# Altium PCB FMC_AWG_DAC_PSU.PcbDoc (part 2 of 2)
Units mm, origin at the board's own origin, x right, y up, seen from the top; angles counter-clockwise.
Board outline 19.1 x 69 mm, 6 copper layers (TOP, L2, L3, L4, L5, BOTTOM), stack 1.482 mm thick; 113 components, 49 nets, 281 pads, 213 vias.
Unrouted connection lines stored in the file: 1.
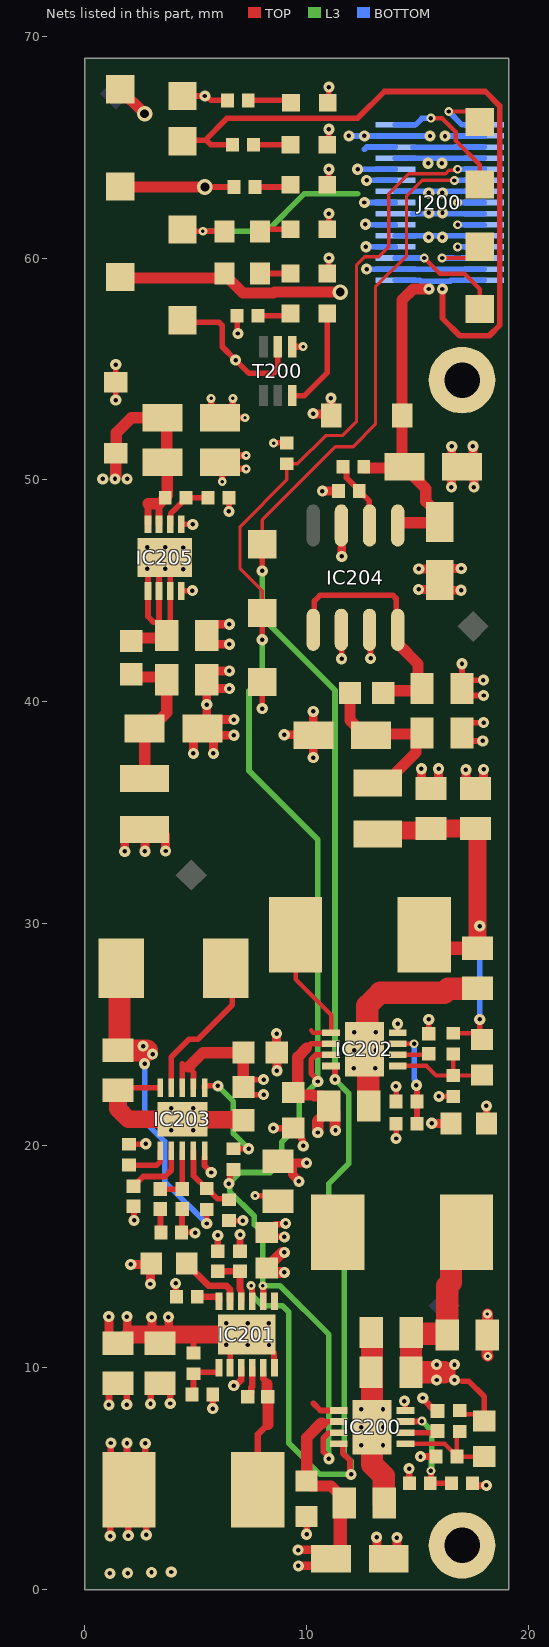
[diagram p6: the nets of this part, all layers, seen from the top]

## Via types
v1: diameter 0.5, hole 0.2, TOP to BOTTOM, tented both sides, 160 vias
v2: diameter 0.5, hole 0.2, TOP to BOTTOM, 24 vias
v3: diameter 0.4, hole 0.15, TOP to BOTTOM, tented both sides, 14 vias
v4: diameter 0.4, hole 0.2, TOP to BOTTOM, tented both sides, 12 vias
v5: diameter 0.7, hole 0.4, TOP to BOTTOM, tented both sides, 3 vias

## Nets (pads, with @x,y where several pads share a name; then routed paths per layer and width w, separated by ;. In a path a pad name is that pad's centre, name@x,y a point inside that pad or via, vN(x,y) a via of type N, cw(c..) or ccw(c..) an arc to the next point about the centre after c; other vN are vias at no path point)
GND: B200.1 B201.1 C200.1 C201.1 C203.1 C204.1 C205.1 C207.1 C208.1 C212.1 C213.1 C215.1 C216.1 C217.1 C218.1 C219.1 C220.1 C221.1 C222.1 C223.1 C225.1 C226.2 C227.2 C228.2 C229.1 C230.1 C231.1 C232.1 C233.1 C234.1 C235.1 C236.1 C237.2 C238.1 C239.1 D200.2 D201.1 IC200.8 IC200.9 IC201.9 IC202.8 IC202.9 IC203.5 IC203.10 IC203.11 IC204.3 IC204.6 IC204.7 IC205.4 IC205.5 J200.5 J200.6 J200.10 J200.12 J200.15 J200.16 J200.19 J200.20 J200.23 J200.24 J200.27 J200.28 L201.2 LD200.1 LD201.1 LD202.1 LD203.2 LD204.1 R202.1 R203.1 R205.2 R209.1 R210.1 R214.1 R216.1 R219.1 R225.1 T200.4 TP204.1 TP207.1 | length 116.9
  TOP w0.254: v1(1.4,53.6) 1.4,54.072 D201.1@1.714,54.385 ; v1(1.4,55.2) 1.4,54.733 1.591,54.542 D201.1@1.732,54.542 ; C222.1@1.5,22.5 1.62,22.62 IC203.5@3.4,22.62 ; v1(2.224,16.643) C223.1@2.224,17.273 ; IC205.4@4.342,45.013 v1(4.855,45.013) ; IC205.5@4.35,48 v1(4.869,48) ; C225.1@4.4,17.15 4.385,17.135 4.385,16.115 R216.1@4.37,16.1 4.951,16.1 v1(4.975,16.077) ; C235.1@5.3,38.8 C235.1@5.5,39 ; IC203.10@5.4,19.482 5.4,19.1 v1(5.7,18.8) ; R214.1@6.5,16.63 v1(7.13,16.63) ; v1(6.5,48.581) R225.1@6.5,49.3 ; v3(7.68,17.756) 8.444,17.756 C239.1@8.7,17.5 ; v1(8,39.7) TP207.1@8,40.9 ; LD201.1@10.925,59.3 11,59.375 v1(11,60) ; LD200.1@10.925,61.3 11,61.375 v1(11,62) ; LD202.1@10.925,63.3 11,63.375 v1(11,64) ; LD204.1@10.925,65.1 11,65.175 v1(11,65.8) ; LD203.2@10.948,67 11,67.052 v1(11,67.7) ; v1(11.579,41.947) IC204.6@11.579,42.666 ; v1(12.879,41.961) IC204.7@12.879,42.68 ; v1(14.03,20.33) R210.1@14.03,21 ; IC202.8@14.1,25.1 v1(14.1,25.5) ; v1(14.4,8.5) 14.45,8.45 IC200.8@14.45,8.077 ; C220.1@15.5,25.05 v1(15.5,25.7) ; v1(15.961,22.231) 15.962,22.23 R209.1@16.6,22.23 ; C230.1@17,41 v1(17,41.719) ; C229.1@17.216,38.242 v1(17.935,38.242) ; C230.1@17.24,40.984 v1(17.959,40.984) ; C229.1@17.252,39.064 v1(17.971,39.064) ; C230.1@17.252,40.288 v1(17.971,40.288)
  TOP w0.3: v1@1.093,8.429 1.096,8.432 1.096,9.086 C218.1@1.098,9.088 ; v1(1.151,2.417) 1.155,2.42 1.155,3.074 L201.2@1.157,3.076 ; L201.2@1.174,5.953 1.176,5.955 1.176,6.609 v1(1.179,6.613) ; v1@1.894,8.44 1.898,8.444 1.898,9.098 C218.1@1.9,9.1 ; L201.2@1.902,5.945 1.904,5.947 1.904,6.601 v1(1.908,6.605) ; v1(1.962,2.441) 1.966,2.445 1.966,3.099 L201.2@1.968,3.101 ; L201.2@2.721,5.937 2.723,5.938 2.723,6.593 v1(2.727,6.596) ; v1(2.773,2.473) 2.776,2.476 2.776,3.131 L201.2@2.778,3.132 ; v1@2.966,8.477 2.969,8.48 2.969,9.135 C219.1@2.971,9.136 ; v1@3.857,8.493 3.861,8.496 3.861,9.151 C219.1@3.862,9.152 ; v3(5.698,53.676) 5.698,53.202 C234.1@6.1,52.8 v3(7.225,52.801) v3(7.225,52.801) ; R205.2@5.735,8.865 5.77,8.83 v1(5.77,8.159) ; v3(6.2,49.926) C233.1@6.2,50.4 ; C234.1@6.674,53.202 v3(6.674,53.676) ; v1(6.715,9.201) 6.801,9.201 7.05,9.45 IC201.9@7.05,10 ; C233.1@6.8,50.5 v3(7.274,50.5) ; C233.1@6.8,51.1 v3(7.274,51.1) ; v1(8.5,20.8) 9.425,20.8 9.75,20.475 9.75,20.323 9.81,20.263 9.81,20.033 v1(9.848,19.994) ; v1(9,15.9) 8.4,15.9 8.151,16.149 8.274,16.149 8.59,16.465 9.015,16.465 v1(9.053,16.503) ; T200.4@9.35,56 9.357,56.007 v3(9.844,56.007) ; v1(10,2.5) C200.1@10,3.3 ; v1(15.13,6.001) R202.1@15.93,6.001 ; v1(15.232,8.639) 15.232,8.618 15.812,8.038 C207.1@15.812,7.939 ; R203.1@17.505,4.7 v1(18.1,4.7) ; C238.1@18.1,21 v1(18.1,21.8)
  TOP w0.4: v1(4.9,37.681) C235.1@4.9,38.4 ; C235.1@5.5,39 C231.1@5.5,40.7 ; v1(5.8,37.681) C235.1@5.8,38.4 ; C231.1@5.8,40.6 v1(6.519,40.6) ; C231.1@5.8,41.4 v1(6.519,41.4) ; C232.1@5.8,42.6 v1(6.519,42.6) ; C232.1@5.8,43.5 v1(6.519,43.5) ; C235.1@6,38.5 v1(6.719,38.5) ; C235.1@6,39.2 v1(6.719,39.2) ; C221.1@8.645,24.427 v1(8.645,25.057) ; v1(8.658,23.383) C221.1@8.658,24.013 ; v1(8.99,38.523) C228.2@9.709,38.523 ; v1(10.294,52.987) 10.313,52.968 10.84,52.968 10.84,52.71 D200.2@10.85,52.7 ; v1(10.298,37.489) C228.2@10.298,38.207 ; C228.2@10.298,38.853 v1(10.298,39.572) ; v1(10.711,49.5) R219.1@11.43,49.5 ; D200.2@10.871,53.092 10.946,53.092 11.094,53.24 11.094,53.684 v1(11.089,53.69) ; v1(11.58,46.556) IC204.3@11.58,47.275 ; C237.2@13.165,1.281 v1@13.165,2.381 ; C237.2@14.074,1.266 v1@14.074,2.366 ; v1(15.045,45.069) 15.59,45.069 C227.2@15.662,44.996 ; v1(15.052,45.992) 15.689,45.992 C227.2@15.694,45.996 ; C215.1@15.169,36.272 v1(15.169,36.991) ; C215.1@15.947,36.272 v1(15.947,36.991) ; C227.2@16.249,46.012 v1(16.967,46.012) ; C227.2@16.319,45.035 16.323,45.03 v1(16.957,45.03) ; C226.2@16.496,50.938 16.537,50.979 v1(16.537,51.514) ; v1(16.518,49.679) 16.518,50.265 C226.2@16.535,50.281 ; C217.1@17.176,36.223 v1(17.176,36.942) ; v1(17.492,51.518) 17.492,50.911 C226.2@17.496,50.906 ; C226.2@17.512,50.351 17.534,50.33 v1(17.534,49.679) ; C217.1@17.974,36.244 v1(17.974,36.963)
  TOP w0.5: TP204.1@1.6,67.6 v5(2.7,66.5) ; v3(18.144,12.423) 18.144,11.498 C203.1@18.132,11.485 18.132,10.548 v3(18.157,10.523)
  TOP w0.8: C222.1@1.5,22.5 1.5,21.669 1.969,21.2 IC203.11@4.4,21.2 4.425,21.175 7.125,21.175 C236.1@7.15,21.15
  TOP w1: C213.1@12.8,21.8 12.775,21.825 12.775,24.162 12.599,24.338 12.734,24.473 12.734,26.314 13.319,26.9 16.2,26.9 16.375,27.075 17.675,27.075 C216.1@17.7,27.1 ; C205.1@12.914,11.585 12.914,11.41 12.95,11.374 IC200.9@12.95,7.327 ; IC200.9@12.949,7.315 12.949,5.651 13.475,5.125 13.475,3.925 C201.1@13.5,3.9
  BOTTOM w0.254: v1(12.3,64) J200.10@14,64 ; v1(12.6,62.5) J200.16@14,62.5 J200.16@14,62.5 ; 12.6,64.9 12.7,65 J200.6@14,65 ; v1(12.649,61.522) 12.67,61.502 13.998,61.502 J200.20@14,61.5 J200.20@13.998,61.498 ; v1(12.67,60.508) 12.678,60.5 J200.24@14,60.5 J200.24@13.998,60.498 ; v1(12.7,59.5) J200.28@14,59.5 J200.27@18,59.5 ; v1(12.7,63.5) J200.12@14,63.5 ; J200.6@14.773,64.998 15.103,64.998 15.11,64.991 16.676,64.991 16.685,65 J200.5@18,65 ; v4(16.8,62.496) 16.802,62.498 17.998,62.498 J200.15@18,62.5 ; v4(16.802,60.498) 16.804,60.5 J200.23@18,60.5 J200.23@18.002,60.502 ; v4(16.802,61.498) 16.804,61.5 J200.19@18,61.5 J200.19@18.002,61.502
  other v1: 1.136,0.736 1.938,0.748 3.009,0.784 3.9,0.8 13.153,2.365 14.062,2.35 1.093,8.329 1.894,8.34 2.966,8.377 3.857,8.393 3.9,20.7 4.9,20.7 3.9,21.7 4.9,21.7 5.5,39.881
  other v2: 12.454,6.509 13.44,6.512 12.467,7.32 13.44,7.323 12.467,8.13 13.44,8.134 12.127,23.497 13.1,23.5 12.141,24.307 13.114,24.311 12.141,25.118 13.114,25.121
N7V5A: C233.2 C234.2 D201.2 IC205.7 IC205.8 J200.7 J200.8 R222.1 R223.2 TP209.1 | length 16.7
  TOP w0.254: TP209.1@4.7,67.3 v1(5.419,67.3) 5.486,67.3 5.686,67.1 R222.1@6.43,67.1
  TOP w0.3: IC205.8@2.85,48.002 2.85,48.338 2.852,48.34 2.852,48.926 ; IC205.7@3.35,48 R223.2@3.35,48.92
  TOP w0.508: v1@1.4,50.2 D201.2@1.4,51.2 1.424,51.224 1.424,52.124 2.1,52.8 C234.2@3.5,52.8 ; 2.852,48.926 R223.2@3.356,48.926 ; C233.2@3.225,50.8 C233.2@3.5,50.8 ; R223.2@3.35,48.92 3.73,49.3 3.715,49.315 3.715,50.785 C233.2@3.7,50.8 ; C233.2@3.677,50.823 3.677,51.2 3.7,51.223 3.7,52.654 C234.2@3.677,52.677
  BOTTOM w0.254: J200.8@13.998,64.498 J200.8@14,64.5 J200.7@18,64.5
  other v1: 0.815,50.051 1.365,50.051 1.915,50.051 15.476,64.269 16.09,64.269
N8V0: C209.1 C210.1 C211.1 C218.2 C219.2 IC201.8 IC201.12 IC201.13 L206.1 R204.1 R206.1 | length 22.1
  TOP w0.254: C209.1@2.958,14.658 C209.1@3,14.7 ; R206.1@4.9,10.67 4.9,11.4 5,11.5 ; IC201.8@6.55,10 6.55,10.75 IC201.13@7.3,11.5 7.7,11.5 8.527,10.673 8.527,10.023 IC201.12@8.55,10
  TOP w0.3: v1(4.1,13.8) 4.1,13.23 R204.1@4.13,13.2 ; v1(5.995,15.964) 5.997,15.961 5.997,15.253 C210.1@6,15.25 ; C211.1@7,15.25 v1(7,16)
  TOP w0.4: C218.2@1.1,11.1 v1@1.1,12.3 ; v1(1.806,33.264) L206.1@1.806,33.983 ; C218.2@1.918,11.103 v1@1.918,12.303 ; v1(2.074,14.658) 2.958,14.658 v1(2.958,13.774) ; v1(2.711,33.273) L206.1@2.711,33.992 ; C219.2@3.027,11.076 v1@3.027,12.276 ; v1(3.647,33.285) L206.1@3.647,34.003 ; C219.2@3.789,11.08 v1@3.789,12.28
  TOP w0.508: C218.2@1.5,11.1 C218.2@1.771,11.371
  TOP w0.8: C218.2@1.5,11.1 1.675,11.1 2.075,11.5 5,11.5 IC201.13@7.3,11.5
  other v1: 3.012,12.282 3.775,12.286 1.085,12.306 1.903,12.309
  other v2: 7.343,11.027 8.303,11.027 6.382,11.041 6.379,12.014 7.339,12 8.3,12
N8V0A: C231.2 C235.2 L206.2 L207.1 | length 6.7
  TOP w0.508: L207.1@2.1,41.25 2.225,41.125 3.575,41.125 C231.2@3.7,41 3.7,39.525 2.975,38.8 C235.2@2.7,38.8 L206.2@2.7,36.55
N8V0A1: C232.2 IC205.1 IC205.2 IC205.3 IC205.9 L207.2 | length 11.4
  TOP w0.254: v2(2.821,45.998) 2.85,45.969 IC205.1@2.85,45 2.85,43.85 3.114,43.586 3.289,43.586 C232.2@3.35,43.525 ; IC205.9@3.6,46.5 3.35,46.25 IC205.2@3.35,45 C232.2@3.35,43.525 ; v2(3.632,45.998) 3.85,45.78 IC205.3@3.85,45 3.85,43.15 C232.2@3.7,43 3.35,43.35 C232.2@3.35,43.525
  TOP w0.508: L207.2@2.1,42.75 2.225,42.875 3.575,42.875 C232.2@3.7,43
  other v2: 4.442,45.984 4.439,46.957 2.818,46.971 3.628,46.971
NetC202_1: C202.1 IC200.5 R200.1 R202.2 | length 5
  TOP w0.2: IC200.5@14.45,6.577 16.213,6.577 R202.2@16.77,6.02 ; R200.1@16.8,7.13 16.77,7.1 R202.2@16.77,6.02 ; C202.1@18,6.3 17.7,6 R202.2@16.77,6 R202.2@16.77,6.02
NetC206_1: C206.1 IC201.11 L201.1 | length 5.5
  TOP w0.3: L201.1@7.8,4.5 7.8,7 8.25,7.45 ; IC201.11@8.05,9.75 8.05,9.5 8.209,9.341 8.209,9.258
  TOP w0.5: 8.209,9.258 8.209,8.741 C206.1@8.25,8.7 8.25,7.45
NetC206_2: C206.2 IC201.10 | length 1.4
  TOP w0.3: C206.2@7.35,8.7 7.51,8.86 7.51,9.11 7.55,9.15 IC201.10@7.55,10
NetC207_2: C207.2 IC200.6 | length 1.4
  TOP w0.254: IC200.6@14.45,7.077 14.452,7.079 15.729,7.079 C207.2@15.8,7.15
NetC209_2: C209.2 IC201.5 | length 3
  TOP w0.3: C209.2@4.6,14.7 4.6,14.675 5.575,13.7 6.374,13.7 6.55,13.524 IC201.5@6.55,13
NetC210_2: C210.2 C211.2 IC201.4 | length 2.4
  TOP w0.3: C210.2@6,14.35 C211.2@7,14.35 7,13.525 7.05,13.475 IC201.4@7.05,13
NetC214_1: C214.1 IC202.5 R207.1 R209.2 | length 5
  TOP w0.2: IC202.5@14.1,23.6 15.4,23.6 15.83,23.17 R209.2@16.6,23.17 ; R207.1@16.6,24.13 R209.2@16.6,23.17 ; C214.1@17.9,23.2 17.87,23.17 R209.2@16.6,23.17
NetC220_2: C220.2 IC202.6 | length 1.4
  TOP w0.2: IC202.6@14.1,24.1 15.45,24.1 C220.2@15.5,24.15
NetC223_2: C223.2 IC203.7 | length 2.9
  TOP w0.254: C223.2@2.2,18.18 2.641,18.621 3.621,18.621 3.9,18.9 IC203.7@3.9,19.78
NetC224_1: C224.1 R216.2 | length 1.1
  TOP w0.254: C224.1@3.4,17.15 3.415,17.135 3.415,16.115 R216.2@3.43,16.1
NetC224_2: C224.2 C225.2 IC203.8 | length 2.7
  TOP w0.254: C224.2@3.4,18.05 C225.2@4.4,18.05 IC203.8@4.4,19.78
NetIC200_1: IC200.1 L200.1 | length 1.3
  TOP w0.254: 10.3,8.4 10.623,8.077 IC200.1@11.45,8.077
NetIC200_7: IC200.7 R201.1 R203.2 | length 4.7
  TOP w0.254: IC200.7@14.45,7.577 14.452,7.579 15.174,7.579 v4(15.194,7.6) ; v4(15.6,5.363) 15.6,4.83 R201.1@15.57,4.8 R203.2@16.53,4.8
  L3 w0.254: v4(15.194,7.6) 15.634,7.161 15.634,5.792 15.628,5.786 15.628,5.391 v4(15.6,5.363)
NetIC201_6: IC201.6 R204.2 | length 1.2
  TOP w0.3: R204.2@5.07,13.2 6.05,13.2 IC201.6@6.05,13
NetIC201_7: IC201.7 R205.1 R206.2 | length 2.1
  TOP w0.254: R205.1@4.9,9 R206.2@4.9,9.73 4.97,9.8 6.027,9.8 6.05,9.823 IC201.7@6.05,10
NetIC202_1: IC202.1 L202.1 | length 6
  TOP w0.2: L202.1@9.5,29.5 9.5,27.5 11.1,25.9 IC202.1@11.1,25.1 10.3,25.1 10.2,25.2
NetIC202_7: IC202.7 R208.1 R210.2 | length 4.4
  TOP w0.2: IC202.7@14.1,24.6 v4(14.84,24.6)
  TOP w0.254: v1(14.942,22.731) 14.942,22.658 14.97,22.63 R210.2@14.97,21
  BOTTOM w0.254: v4(14.84,24.6) 14.84,23.003 14.894,22.948 14.894,22.778 v1(14.942,22.731)
NetIC203_1: IC203.1 R212.2 | length 4.6
  TOP w0.254: IC203.1@5.4,22.62 5.4,22.698 5.402,22.7 v1(6,22.7) ; R212.2@6.9,19.87 7.384,19.87 v1(7.386,19.868)
  L3 w0.254: v1(6,22.7) 6.7,22 6.7,20.554 v1(7.386,19.868)
NetIC203_4: IC203.4 L203.1 | length 6.8
  TOP w0.254: IC203.4@3.9,22.62 3.9,24 4.7,24.8 5.1,24.8 6.65,26.35 L203.1@6.65,28
NetIC203_6: IC203.6 R215.2 | length 2
  TOP w0.254: R215.2@2,19.13 3.251,19.13 3.4,19.279 IC203.6@3.4,19.78
NetIC203_9: IC203.9 R213.1 R214.2 | length 3.2
  TOP w0.254: IC203.9@4.9,19.78 4.9,18.65 5.48,18.07 R213.1@5.5,18.07 ; R213.1@5.52,18.07 5.982,17.608 6.462,17.608 R214.2@6.5,17.57
NetIC204_2: IC204.2 R217.1 R219.2 | length 3.2
  TOP w0.254: R217.1@11.63,50.6 11.793,50.437 11.793,50.097 12.37,49.52 12.37,49.48 12.533,49.317 12.553,49.317 12.825,49.045 12.825,47.96 IC204.2@12.835,47.95
NetIC205_6: IC205.6 R223.1 R225.2 | length 2.5
  TOP w0.254: IC205.6@3.85,48 3.873,48.023 3.873,48.487 4.022,48.636 4.026,48.636 4.59,49.2 R225.2@5.56,49.2
NetJ200_1: J200.1 TP200.1 | length 3.4
  TOP w0.2: v4(16.4,66.6) 17.325,66.6 TP200.1@17.8,66.125
  BOTTOM w0.254: v4(16.4,66.6) 17,66 J200.1@18,66
NetJ200_2: J200.2 TP201.1 | length 5.9
  TOP w0.2: v4(15.6,66.3) 15.604,66.296 16.1,66.296 16.402,65.994 16.408,65.994 16.709,65.693 16.709,65.291 17.8,64.2 TP201.1@17.8,63.316
  BOTTOM w0.254: J200.2@14,66 14.9,66 15.193,66.293 15.574,66.293 v4@15.581,66.3
NetJ200_25: J200.25 TP202.1 | length 3.8
  TOP w0.2: v4@16.117,60 17.292,60 TP202.1@17.8,60.508
  BOTTOM w0.254: v4(16.1,60) 16.167,60 16.587,60 16.593,59.994 17.011,59.994 17.015,59.998 17.998,59.998 J200.25@18,60
NetJ200_26: J200.26 TP203.1 | length 5.3
  TOP w0.2: v4(15.3,60) 16,59.3 17.1,59.3 17.8,58.6 TP203.1@17.8,57.7
  BOTTOM w0.254: J200.26@14,60 v4(15.3,60)
NetLD200_2: LD200.2 R218.1 | length 1.4
  TOP w0.254: R218.1@7.9,61.2 8,61.3 LD200.2@9.275,61.3
NetLD201_2: LD201.2 R220.1 | length 1.4
  TOP w0.254: R220.1@7.9,59.3 LD201.2@9.275,59.3
NetLD202_2: LD202.2 R221.1 | length 1.6
  TOP w0.254: R221.1@7.67,63.2 9.175,63.2 LD202.2@9.275,63.3
NetLD203_1: LD203.1 R222.2 | length 2
  TOP w0.254: R222.2@7.37,67.1 9.198,67.1 LD203.1@9.298,67
NetLD204_2: LD204.2 R224.2 | length 1.7
  TOP w0.254: R224.2@7.6,65.1 LD204.2@9.275,65.1
NetLD205_1: LD205.1 T200.3 | length 4.7
  TOP w0.254: T200.3@9.35,53.8 9.9,53.8 10.925,54.825 LD205.1@10.925,57.5
NetLD205_2: LD205.2 R226.1 | length 1.5
  TOP w0.254: R226.1@7.8,57.4 9.175,57.4 LD205.2@9.275,57.5
P1V7: C222.2 J200.17 J200.18 L203.2 R213.2 T200.5 TP211.1 | length 23.9
  TOP w0.254: TP211.1@4.7,57.1 6.051,57.1 6.2,56.951 6.2,56 v1(6.8,55.4) 7.4,54.8 8.5,54.8 8.7,55 T200.5@8.7,56 ; v1(5.5,16.5) R213.2@5.5,17.13
  TOP w1: C222.2@1.5,24.3 C222.2@1.55,24.3 ; L203.2@1.65,28 1.575,27.925 1.575,24.325 C222.2@1.55,24.3 ; 2.8,24.3 C222.2@1.55,24.3
  BOTTOM w0.254: v1(2.7,23.7) 2.7,21.1 3.6,20.2 3.6,18.4 v1(5.5,16.5) ; J200.18@14.773,61.998 15.389,61.998 15.395,61.992 16.909,61.992 16.917,62 J200.17@18,62
  other v1: 3.061,24.135 2.635,24.49 15.507,62.036 16.121,62.036
P3V3: C221.2 C236.2 IC203.2 IC203.3 J200.21 J200.22 R211.2 R215.1 R220.2 TP206.1 | length 23.4
  TOP w0.254: TP206.1@1.6,59.14 TP206.1@1.64,59.1 ; R215.1@2,20.07 2.73,20.07 v1(2.753,20.093) ; IC203.3@4.4,22.62 4.4,23.7 ; IC203.2@4.9,22.62 4.9,23.3 ; C221.2@7,24.05 C221.2@7.15,24.2 ; C236.2@7.433,22.304 v1(8.063,22.304) ; C236.2@7.433,22.984 v1(8.063,22.984) ; v3(8.515,51.66) 8.525,51.67 R211.2@9.1,51.67
  TOP w0.5: TP206.1@1.64,59.1 6.1,59.1 R220.2@6.3,59.3 6.3,59.25 7.127,58.423 8.506,58.423 8.546,58.463 v5(11.516,58.463)
  TOP w0.508: 4.652,23.552 4.716,23.552 4.77,23.606 ; 4.684,23.552 5.332,24.2 C221.2@7.15,24.2 ; C221.2@7,24.05 7.054,24.05 7.15,23.954 C236.2@7.15,22.65
  BOTTOM w0.254: J200.22@14,61 17.46,61 17.46,60.998 17.998,60.998 J200.21@18,61
  other v1: 15.498,60.935 16.112,60.935
P3V6: C202.2 C203.2 C204.2 C205.2 J200.13 J200.14 L200.2 R200.2 R218.2 TP205.1 | length 27.1
  TOP w0.2: R200.2@16.8,7.97 16.87,7.9 C202.2@18,7.9
  TOP w0.254: TP205.1@4.4,61.28 4.472,61.208 v3(5.323,61.208) 6.292,61.208 R218.2@6.3,61.2 ; 17,9.4 17.3,9.4 18,8.7 18,7.9 C202.2@18,7.6
  TOP w1: 16.2,9.8 C204.2@14.7,9.8 14.707,9.807 14.707,11.579 C205.2@14.714,11.585 14.714,11.56 14.739,11.535 16.307,11.535 C203.2@16.332,11.51 ; C203.2@16.332,11.485 C203.2@16.332,11.51 ; L200.2@17.2,16.1 16.5,15.4 16.5,13.854 16.332,13.685 C203.2@16.332,11.51
  L3 w0.254: v3(5.323,61.208) 8.208,61.208 9.9,62.9 12.29,62.9
  BOTTOM w0.254: J200.14@14,63 J200.13@18,63
  other v1: 15.858,9.449 16.662,9.449 15.858,10.143 16.662,10.143 15.5,62.937 16.114,62.937
P7V5A: C226.1 C227.1 D200.1 IC204.1 J200.29 J200.30 R217.2 R224.1 TP210.1 | length 51.1
  TOP w0.254: TP210.1@4.7,65.3 5.419,65.3 ; R224.1@6.66,65.1 5.686,65.1 5.486,65.3 5.419,65.3 ; v1(16.119,58.605) 16.119,57.281 16.9,56.5 18.229,56.5 18.696,56.967 18.696,66.858 18.054,67.5 13.5,67.5 12.304,66.304 6.423,66.304 5.419,65.3
  TOP w0.508: R217.2@12.57,50.58 12.606,50.544 13.056,50.544 ; 13.057,50.543 14.157,50.543 14.4,50.3 14.675,50.3 15.372,49.603 15.372,49.028 15.754,48.646 15.754,48.471 16.025,48.2 16.2,48.2 16.075,48.075 14.147,48.075 14.105,48.033 IC204.1@14.105,47.95 ; C226.1@14.4,50.6 14.3,50.7 14.3,58.1 14.805,58.605 v1(15.505,58.605)
  BOTTOM w0.254: J200.30@14,59 J200.30@14,59 15.1,59 15.14,58.96 16.473,58.96 16.513,59 J200.29@18,59
P8V0: C214.2 C215.2 C216.2 C217.2 L202.2 L204.1 R207.2 | length 19
  TOP w0.2: R207.2@16.6,25.07 17.63,25.07 C214.2@17.8,24.9
  TOP w0.254: v1(17.8,25.7) 17.8,24.9 C214.2@17.9,24.8
  TOP w0.6: L202.2@15.3,29.5 15.9,28.9 C216.2@17.7,28.9
  TOP w0.8: L204.1@13.2,34.05 13.359,34.209 15.509,34.209 C215.2@15.6,34.3 C217.2@17.6,34.3 17.7,34.2 C216.2@17.7,28.9
  BOTTOM w0.254: v1(17.8,25.7) v1(17.8,29.9)
P8V0A: C228.1 C229.2 L204.2 L205.1 | length 7.8
  TOP w0.508: L205.1@11.95,40.4 11.95,39.175 12.625,38.5 C228.1@12.9,38.5 12.95,38.55 14.929,38.55 15.15,38.55 C229.2@15.2,38.6 ; L204.2@13.2,36.35 13.7,36.35 14.046,36.696 14.046,36.846 14.929,37.729 C229.2@14.929,38.329
P8V0A1: C230.2 IC204.5 IC204.8 L205.2 | length 11.5
  TOP w0.254: IC204.5@10.295,43.25 10.347,43.302 10.347,44.547 10.6,44.8 13.89,44.8 14.039,44.651 14.039,43.316 IC204.8@14.105,43.25
  TOP w0.508: L205.2@13.45,40.4 13.55,40.5 15.1,40.5 C230.2@15.2,40.6 15.022,40.778 15.022,41.708 14.105,42.625 IC204.8@14.105,43.25
P12V0: C200.2 C201.2 C208.2 C212.2 C213.2 C237.1 C238.2 C239.2 IC200.2 IC201.1 IC202.2 J200.3 J200.4 R201.2 R208.2 R221.2 R226.2 TP208.1 | length 37.8
  TOP w0.254: TP208.1@1.6,63.22 TP208.1@1.62,63.2 ; v5(5.419,63.2) R221.2@6.73,63.2 ; R226.2@6.86,57.4 6.88,57.38 6.88,56.62 v1(6.9,56.6) ; v1@9.6,1.8 9.611,1.789 v1(9.616,1.789) ; 10,24.4 10.2,24.6 10.4,24.6 IC202.2@11.1,24.6 ; C237.1@10.7,1.8 C237.1@11.1,1.4 ; 10.7,7.5 10.775,7.575 11.448,7.575 IC200.2@11.45,7.577 ; v1(14.022,22.682) 14,22.66 14,22.6 14.03,22.57 R208.2@14.03,22
  TOP w0.3: R201.2@14.621,4.656 v1(14.621,5.456)
  TOP w0.4: C239.2@8.7,19.3 C239.2@9.025,18.975 ; v1@9.6,1.8 C237.1@10.7,1.8 ; v1@9.615,1.084 C237.1@10.715,1.084 ; v1(9.65,18.4) 9.65,18.427 9.354,18.723 9.354,18.975 C239.2@9.025,18.975 ; v1(9.998,19.228) 9.993,19.223 9.2,19.223 9.025,19.048 C239.2@9.025,18.975 ; v1(15.637,21.017) 15.654,21 C238.2@16.5,21
  TOP w0.5: TP208.1@1.62,63.2 v5(5.419,63.2) ; v1(9,14.3) 8.4,14.3 C208.2@8.2,14.5 8.9,15.2 v1(9,15.2) ; C212.2@9.4,22.4 9.6,22.6 9.6,24 10,24.4 ; C212.2@9.6,22.4 9.6,22.332 9.65,22.282 10.318,22.282 10.35,22.25 10.725,22.25 11,21.975 C213.2@11,21.8 ; v1(10.5,20.6) 10.5,21.125 11,21.625 C213.2@11,21.8 ; v1(11.3,20.7) 11.275,20.725 11.275,21.525 C213.2@11,21.8
  TOP w0.508: 10.7,7.5 10.655,7.5 10,6.845 C200.2@10,4.9 10.221,4.679 11.096,4.679 11.7,4.075 C201.2@11.7,3.9
  TOP w0.6: C237.1@11.1,1.4 11.188,1.4 11.513,1.725 11.513,3.713 C201.2@11.7,3.9
  BOTTOM w0.254: v1(11.9,65.5) v1(12.6,65.5) J200.4@14,65.5 15.654,65.5 v1@15.658,65.496 ; v1(16.232,65.495) 16.235,65.498 17.998,65.498 J200.3@18,65.5
  other v1: 9.631,1.073 15.558,65.496
PGOOD: IC200.4 IC201.3 IC202.4 J200.11 TP213.1 | length 81.7
  TOP w0.15: TP213.1@8,47.1 8,48.2 11.3,51.5 12.1,51.5 13.1,52.5 13.1,58.7 14.5,60.1 14.5,62.8 15.2,63.5 16.651,63.5 v4(16.659,63.492)
  TOP w0.254: v3(7.5,13.7) 7.55,13.65 IC201.3@7.55,13 ; v1(8,45.9) TP213.1@8,47.1 ; IC202.4@11.1,23.6 11.274,23.6 11.276,23.598 v1(11.276,22.989) ; IC200.4@11.629,6.569 11.629,6.146 11.953,5.822 11.953,5.247 v1(12,5.2)
  L3 w0.254: v3(7.5,13.7) 7.528,13.672 7.528,13.272 8,12.8 8.9,12.8 9.2,12.5 9.2,6.6 10.6,5.2 v1(12,5.2) 12,5.8 11.7,6.1 11.7,14.7 11,15.4 11,18.3 11.9,19.2 11.9,22.365 v1(11.276,22.989) 11.276,40.524 8,43.8 v1(8,45.9)
  BOTTOM w0.254: v4(16.659,63.492) 16.665,63.498 17.998,63.498 J200.11@18,63.5
PWR_ENABLE: IC200.3 IC201.2 IC202.3 J200.9 R211.1 R212.1 TP212.1 | length 77.6
  TOP w0.15: TP212.1@8,44 8,45 7,46 7,47.9 9.1,50 R211.1@9.1,50.73 9.58,50.73 10.85,52 11.6,52 12.248,52.648 12.248,59.687 12.617,60.056 13.256,60.056 13.7,60.5 13.7,62.9 14.6,63.8 16.26,63.8 16.412,63.952 16.652,63.952 v4@16.7,64
  TOP w0.254: v1(6.5,18.3) 6.547,18.347 6.547,18.797 R212.1@6.68,18.93 ; v1(8,42.8) TP212.1@8,44 ; v1(10.5,22.9) 10.5,22.967 10.2,23.267 10.2,23.887 10.411,24.098 11.098,24.098 IC202.3@11.1,24.1 ; v1(11,5.9) 11,5.967 10.746,6.221 10.746,6.828 10.973,7.054 11.427,7.054 IC200.3@11.45,7.077
  TOP w0.3: v3(8.027,13.698) 8.027,13.673 8.05,13.65 IC201.2@8.05,13
  L3 w0.254: v1(8,42.8) 8,41.1 7.4,40.5 7.4,36.9 10.5,33.8 v1(10.5,22.9) 9.665,22.065 9.665,20.958 8.878,20.17 8.878,19.315 8.363,18.8 7,18.8 v1(6.5,18.3) 6.529,18.271 6.529,17.944 7.647,16.825 7.647,16.453 8.027,16.073 v3(8.027,13.698) 8.802,13.698 11,11.5 v1(11,5.9)
  BOTTOM w0.254: v4(16.8,64) J200.9@18,64
pads on no net: FTG5.1 FTG6.1 FTG7.1 FTG8.1 IC204.4 T200.1 T200.2 T200.6

## Polygon pours and split planes (outlines as drawn)
NetIC202_1 on TOP "NETIC202_1_L01_P001" (solid, pour order 1): 11.76,24.9 10.246,24.9 8.1,27.8 8.1,31.2 8.4,31.5 10.8,31.5 11,31.3 11,28 11.76,27.24 11.76,25.653
NetIC200_1 on TOP "NETIC200_1_L01_P000" (solid, pour order 0): 9.8,16.7 9.3,16.2 9.3,9.1 10.558,7.842 11.942,7.842 12.045,7.945 12.045,8.645 12.1,8.7 12.1,16.7
GND on TOP "GND_L01_P020" (solid, pour order 20): 0.3,10.2 0.3,0.3 5.6,0.3 5.6,6.2 4.419,7.381 4.419,10.2
NetC206_1 on TOP "NETC206_1_L01_P019" (solid, pour order 19): 7.957,9.3 7.957,7.757 6.4,6.2 6.4,2.8 6.6,2.6 9,2.6 9.2,2.8 9.2,6.4 8.547,7.053 8.547,9.304
NetIC203_4 on TOP "NETIC203_4_L01_P002" (solid, pour order 2): 3.6,23.2 3.6,24.6 5.1,26.1 5.1,29.4 5.3,29.6 7.4,29.6 7.6,29.4 7.6,26.3 7.5,26.2 7.15,26.2 5.65,24.7 5,24.7 4.148,23.848 4.148,23.198
P12V0 on L4 "P12V0_L04_P018" (solid, pour order 18): 19.1,69 19.1,0 0,0 0,69
P3V3 on L4 "P3V3_L04_P006" (solid, pour order 6): 2.503,19.6 5.148,19.6 ccw(c5.148,22.14) 6.944,20.344 8.256,21.656 ccw(c6.46,23.452) 9,23.452 9,51.848 cw(c11.54,51.848) 9.744,53.644 16.246,60.146 ccw(c15.393,61) 16.6,61 16.6,61.117 ccw(c15.917,61.117) 16.4,61.6 ccw(c15.415,60.615) 15.415,62.008 15.13,62.008 ccw(c15.13,59.688) 13.49,61.328 5.644,53.482 ccw(c7.44,51.686) 4.9,51.686 4.9,25.752 cw(c2.36,25.752) 4.156,23.956 3.02,22.82 ccw(c4.816,21.024) 2.276,21.024 2.276,20.561 2.295,19.802 ccw(c2.503,19.808)
GND on L3 "GND_L03_P022" (solid, remove dead copper, pour order 22): 19.1,69 19.1,0 0,0 0,69
P3V6 on L3 "P3V6_L03_P007" (solid, remove dead copper, pour order 7): 18.71,65.222 18.71,8.8 12.1,8.8 12.1,65.222
N8V0 on L3 "L2-N8V0" (solid, remove dead copper, pour order 21): 4.082,10.3 9,10.3 9,12.4 8.766,12.634 7.8,12.634 7.8,15.4 ccw(c6.5,15.4) 6.5,16.7 6.3,16.7 cw(c6.3,18) 5,18 5,34.8 ccw(c4.6,34.8) 4.6,35.2 0,35.2 0,10.3 4.082,10.3
GND on BOTTOM "GND_L06_P003" (solid, pour order 3): 19.1,69 19.1,0 0,0 0,69
N7V5A on L5 (split plane): 18.59,63.279 18.552,63.295 18.5,63.302 14.366,63.302 14.148,63.294 13.932,63.268 13.718,63.225 13.508,63.166 13.304,63.091 13.106,63 12.916,62.893 12.735,62.772 12.564,62.637 12.404,62.489 11.557,61.643 5.055,55.141 4.881,54.953 4.722,54.751 4.579,54.538 4.454,54.314 4.346,54.081 4.257,53.84 4.188,53.593 4.138,53.341 4.108,53.086 4.097,52.83 4.098,52.83 4.098,51.07 4.099,51.062 4.091,50.845 4.064,50.622 4.02,50.401 3.959,50.184 3.882,49.973 3.787,49.769 3.677,49.573 3.552,49.386 3.413,49.209 3.266,49.05 3.259,49.045 3.155,48.941 3.15,48.934 2.991,48.787 2.814,48.648 2.627,48.523 2.431,48.413 2.227,48.318 2.016,48.241 1.799,48.18 1.578,48.136 1.355,48.109 1.138,48.101 1.13,48.102 0.51,48.102 0.51,64 0.51,68.49 18.59,68.49
GND on L5 (split plane): 16.47,57.498 18.59,57.498 18.59,0.51 0.51,0.51 0.51,21.998 2.251,21.998 2.448,22.006 2.642,22.032 2.834,22.075 3.021,22.134 3.203,22.209 3.377,22.299 3.542,22.405 3.698,22.524 3.843,22.657 7.845,26.659 8.019,26.847 8.178,27.049 8.321,27.262 8.446,27.486 8.554,27.719 8.643,27.96 8.712,28.207 8.762,28.459 8.792,28.714 8.803,28.97 8.802,28.97 8.802,49.83 8.801,49.838 8.809,50.055 8.836,50.278 8.88,50.499 8.941,50.716 9.018,50.927 9.113,51.131 9.223,51.327 9.348,51.514 9.487,51.691 9.634,51.85 9.641,51.855 14.445,56.659 14.45,56.666 14.609,56.813 14.786,56.952 14.973,57.077 15.169,57.187 15.373,57.282 15.584,57.359 15.801,57.42 16.022,57.464 16.245,57.491 16.462,57.499
P1V7 on L5 (split plane): 18.59,57.902 16.47,57.902 16.47,57.903 16.214,57.892 15.959,57.862 15.707,57.812 15.46,57.743 15.219,57.654 14.986,57.546 14.762,57.421 14.549,57.278 14.347,57.119 14.159,56.945 9.355,52.141 9.181,51.953 9.022,51.751 8.879,51.538 8.754,51.314 8.646,51.081 8.557,50.84 8.488,50.593 8.438,50.341 8.408,50.086 8.397,49.83 8.398,49.83 8.398,28.97 8.399,28.962 8.391,28.745 8.364,28.522 8.32,28.301 8.259,28.084 8.182,27.873 8.087,27.669 7.977,27.473 7.852,27.286 7.713,27.109 7.566,26.95 7.559,26.945 3.557,22.943 3.553,22.936 3.424,22.82 3.278,22.712 3.123,22.619 2.959,22.541 2.788,22.48 2.612,22.436 2.433,22.409 2.259,22.401 2.251,22.402 0.51,22.402 0.51,47.698 1.13,47.698 1.13,47.697 1.386,47.708 1.641,47.738 1.893,47.788 2.14,47.857 2.381,47.946 2.614,48.054 2.838,48.179 3.051,48.322 3.253,48.481 3.441,48.655 3.545,48.759 3.719,48.947 3.878,49.149 4.021,49.362 4.146,49.586 4.254,49.819 4.343,50.06 4.412,50.307 4.462,50.559 4.492,50.814 4.503,51.07 4.502,51.07 4.502,52.83 4.501,52.838 4.509,53.055 4.536,53.278 4.58,53.499 4.641,53.716 4.718,53.927 4.813,54.131 4.923,54.327 5.048,54.514 5.187,54.691 5.334,54.85 5.341,54.855 11.843,61.357 12.689,62.204 12.694,62.21 12.841,62.345 13.005,62.471 13.179,62.582 13.363,62.677 13.554,62.757 13.752,62.819 13.954,62.864 14.159,62.891 14.357,62.899 14.366,62.898 18.5,62.898 18.552,62.905 18.59,62.921
GND on L2 (split plane): 18.59,0.51 0.51,0.51 0.51,64 0.51,68.49 18.59,68.49

## Keep-outs
TOP:
  lines w0.05: 19,52.4 19,66.3
Keep-Out Layer:
  lines w0.1: 0,0 0,64 0,69 18.7,69 19,68.7 19,66.3 19,0 0,0

## Other copper
TOP:
  rectangle net P7V5A: 15.2,58.3 16.5,58.9
  rectangle net P1V7: 2.4,23.4 3.3,24.8
  rectangle net N8V0: 0.8,11.3 2.635,11.898
  rectangle net N7V5A: 0.5,49.7 2.3,50.4
  rectangle net P3V6: 15.515,9.093 17.115,10.493
  rectangle net P12V0: 8.399,13.268 8.7,14.083
  rectangle net P3V3: 4.28,23.244 5.024,23.86
  region net NetIC200_1: 12.6,14.424 12.6,14.3 12,13.7 12,14.415 12.012,14.426
L3:
  pour cut-out: 5.4,19.9 5.4,22.4 5.1,22.4 5.1,19.9
BOTTOM:
  rectangle net P3V6: 15.144,62.643 16.392,63.304
  rectangle net N8V0A1: 2.489,45.641 4.732,47.289
  rectangle net P12V0: 15.213,65.248 16.573,65.757
  rectangle net N7V5A: 15.071,64 16.4,64.589
  rectangle net P1V7: 15.14,61.7 16.398,62.36
  rectangle net P3V3: 15.142,60.641 16.39,61.302
  rectangle net P7V5A: 15.14,58.3 16.5,58.96
  text "milling cuts pads on purpose" at 21.3,56.3 h0.51 r90
L5 (plane layer: these items are gaps in the copper):
  lines w0.4: -0.2,47.9 1.13,47.9 ccw(c1.13,50.966) 3.298,48.798 3.402,48.902 ccw(c1.234,51.07) 4.3,51.07 4.3,52.83 cw(c7.366,52.83) 5.198,54.998 12.546,62.346 ; 0.1,22.2 2.251,22.2 ccw(c2.251,24.249) 3.7,22.8 7.702,26.802 ccw(c5.534,28.97) 8.6,28.97 8.6,49.83 cw(c11.666,49.83) 9.498,51.998 14.302,56.802 cw(c16.47,54.634) 16.47,57.7 18.7,57.7 ; 11.7,61.5 12.546,62.346 ; 18.5,63.1 14.366,63.1 ccw(c14.366,60.527) 12.546,62.346

## Silkscreen, mask and mechanical layers (free items; w line width, h text height)
TopOverlay:
  lines w0.15: 5.3,66.3 16,66.3 ; 5.335,56.165 16.035,56.165 ; 5.335,58.205 16.035,58.205 ; 5.335,60.245 16.035,60.245 ; 5.335,62.285 16.035,62.285 ; 5.335,64.325 16.035,64.325
  lines w0.2: 0,56.3 3,56.3 3,69 ; 16.4,68.9 16.4,56.4 19,56.4 ; 8.464,50.2 8.464,52.3 9.7,52.3 9.7,50.2 8.464,50.2
  text "tp" at 17.005,67.238 h0.76
  text "N7V5" at 11.4,66.4 h0.76
  text "GND" at -1.193,65.419 h0.6
  text "P7V5" at 12,64.6 h0.76
  text "P12V0" at 11.2,62.7 h0.76
  text "P12V0" at -1.057,61.15 h0.6
  text "P3V6" at 12.058,60.702 h0.76
  text "P3V3" at 12.1,58.7 h0.76
  text "P3V3" at -1.149,56.89 h0.6
  text "P1V7" at 12.039,56.9 h0.76
  text "Force En" at 8.3,48.1 h0.6 r90
  text "PGOOD" at 7,45.5 h0.6 r90
  text "PWR_En" at 3.4,43.6 h0.6
  text "GND" at 7.2,38.9 h0.6
  text "Waver_FMC PSU v1.0" at 3.5,34.3 h0.76
Mechanical 1:
  lines w0.127: 19.1,0 19.1,69 0,69 0,64 0,0 19.1,0 ; 19.1,0 19.1,0